# Altium PCB SRM_DOUBLE_V2_SIGNAL.PcbDoc (part 1 of 2)
Units mil, origin at the board's own origin, x right, y up, seen from the top; angles counter-clockwise.
Board outline 9351.05 x 5413.48 mil, 2 copper layers (Top Layer, Bottom Layer); 135 components, 145 nets, 510 pads, 115 vias.
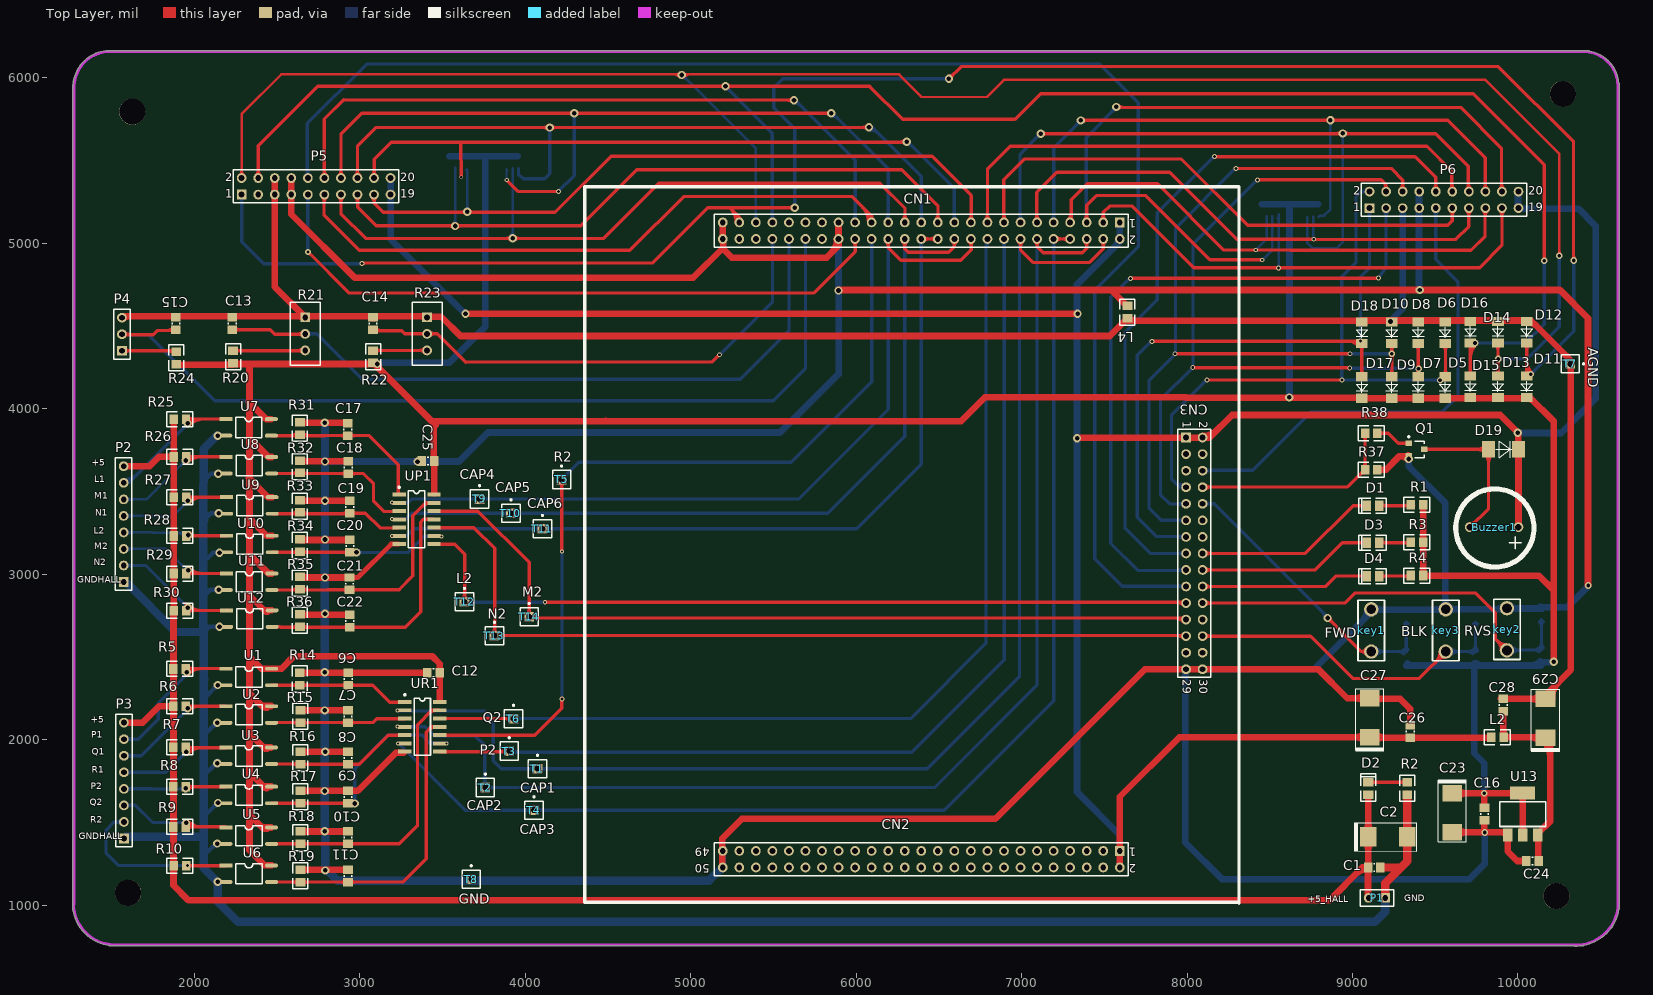
[diagram p0: Top Layer view]
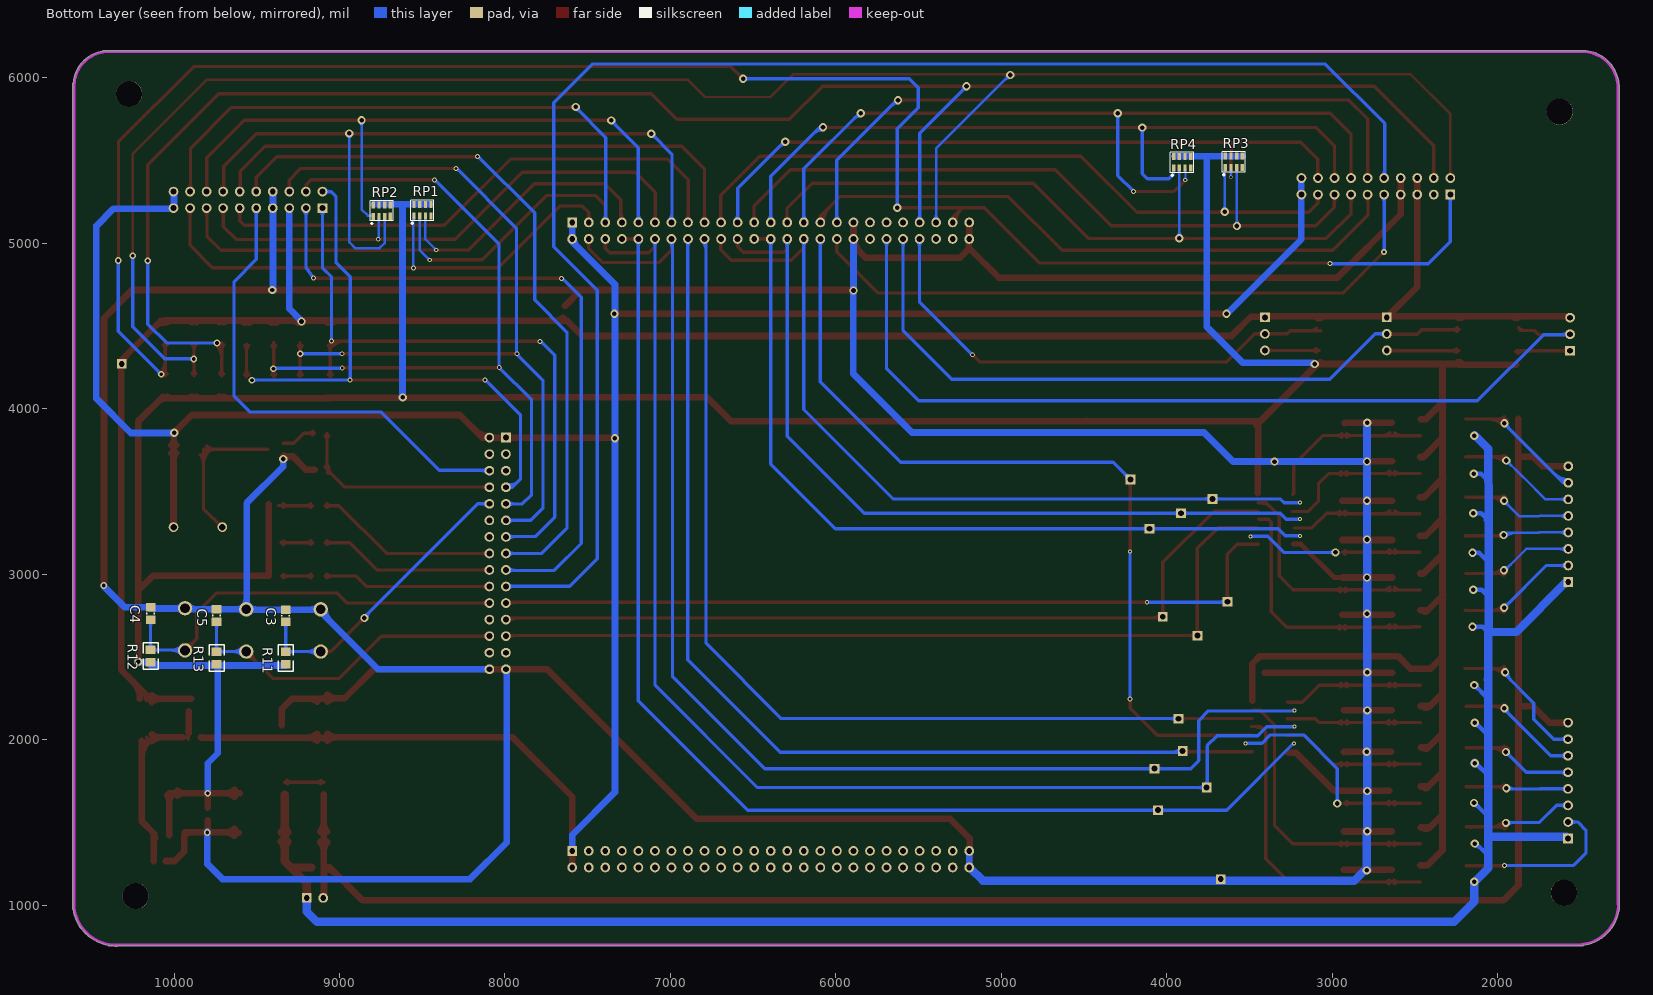
[diagram p1: Bottom Layer view, seen from below]

## Layer stack, top to bottom
Top Layer: signal copper 1.4
Dielectric: dielectric 12.6, FR-4, Dk 4.8
Bottom Layer: signal copper 1.4

## Board outline
1262.49,1006.88 ccw(c1519.77,1011.04) 1481.84,756.54 ccw(c1487,762) 1487,754.49 10339.9,754.49 ccw(c10345,760) 10344.9,752.49 ccw(c10348.5,1017.5) 10381.19,754.49 10393,754.49 ccw(c10393,762) 10398.85,757.29 ccw(c10348.5,1017.5) 10610.24,975.81 ccw(c10604,980) 10611.51,980 10611.51,984.8 ccw(c10348.5,1017.5) 10613.54,1016.64 ccw(c10606.02,1016.66) 10613.54,1016.66 ccw(c10606.02,1016.66) 10611.51,1021.79 10611.51,5964 ccw(c10604,5964) 10609.41,5969.22 ccw(c10394.7,5950.44) 10430.66,6162.95 ccw(c10425,6158) 10425,6165.52 10408.65,6165.52 ccw(c10394.7,5950.44) 10380.76,6165.52 1668,6165.52 ccw(c1668,6158) 1664.25,6164.52 1469,6164.52 ccw(c1469,6157) 1467.5,6164.36 ccw(c1466,6157) 1465.24,6164.48 ccw(c1487.78,5943.42) 1266.26,5960.85 ccw(c1272,5956) 1264.48,5956 1264.48,1012.1 ccw(c1270,1007)

## Design rules (kind name [scope] priority, off if disabled: settings)
Clearance [All] p1: gap=12
ComponentClearance [All] p1: gap=10 collisioncheckmode=3 verticalgap=10
HoleSize [All] p1: absolutevalues=TRUE maxlimit=1001 minlimit=1 maxpercent=80.000 minpercent=20.000
PolygonConnect [All] p1: connectstyle=Relief reliefconductorwidth=10 reliefentries=4 polygonreliefangle="90 Angle"
RoutingVias [All] p1: holewidth=28 width=50 viastyle="Through Hole" minholewidth=12 minwidth=22 maxholewidth=280 maxwidth=500
SolderMaskExpansion [All] p1: expansion=4
TestPointUsage [All] p1: valid=0 allowmultiple=FALSE
Testpoint [All] p1: side=15 testpointundercomponent=TRUE minsize=40 maxsize=100 preferedsize=60 minholesize=0 maxholesize=40 preferedholesize=32 testpointgrid=1 style=1023 order=0123456789
Width [All] p1: maxlimit=60 minlimit=10 preferedwidth=15
17 further rules are at their usual default settings.

## Components (designator, comment, footprint, x,y, rotation, side; value= is the part's Value field where it differs from the comment)
Buzzer1 "BUZZER" Buzzer 9863,3285 r180 top
C1 "104" C2012-0805 9131,1228 r180 top
C2 "10uF/25V" C_10UF/25V 9240,1414 r90 top
C3 "104" C2012-0805 9325,2749 r270 bottom
C4 "104" C2012-0805 10141,2762 r270 bottom
C5 "104" C2012-0805 9743,2750 r270 bottom
C6 "102" C2012-0805 2929,2367 r270 top
C7 "102" C2012-0805 2928,2141 r270 top
C8 "102" C2012-0805 2928,1889 r270 top
C9 "102" C2012-0805 2928,1654 r270 top
C10 "102" C2012-0805 2928,1408 r270 top
C11 "102" C2012-0805 2928,1177 r270 top
C12 "104" C2012-0805 3445,2405 r0 top
C13 "104" C2012-0805 2228,4516 r270 top
C14 "104" C2012-0805 3079,4515 r270 top
C15 "104" C2012-0805 1887,4516 r270 top
C16 "104" C2012-0805 9797,1551 r90 top
C17 "102" C2012-0805 2926,3876 r270 top
C18 "102" C2012-0805 2929,3646 r270 top
C19 "102" C2012-0805 2938,3407 r270 top
C20 "102" C2012-0805 2939,3170 r270 top
C21 "102" C2012-0805 2936,2943 r270 top
C22 "102" C2012-0805 2938,2717 r270 top
C23 "10uF/25V" C_10UF/25V 9604,1531 r0 top
C24 "104" C2012-0805 10088,1267 r0 top
C25 "104" C2012-0805 3411,3684 r0 top
C26 "104" C2012-0805 9349,2050 r270 top
C27 "10uF/25V" C_10UF/25V 9103,2160 r180 top
C28 "104" C2012-0805 9911,2209 r270 top
C29 "10uF/25V" C_10UF/25V 10165,2157 r180 top
CN1 "CN IO" HDR2X25 7593,5127 r180 top
CN2 "CN BUS" HDR2X25 7593,1328 r180 top
CN3 "CN IOE" HDR2X15 7994,3826 r270 top
D1 "FWD" LED-SMD 9123.26,3415 r0 top
D2 "" LED-SMD 9095,1707 r270 top
D3 "RVS" LED-SMD 9123.26,3191 r0 top
D4 "BLK" LED-SMD 9123.26,2989 r0 top
D5 "IN4148" IN4148 9560,4133 r270 top
D6 "IN4148" IN4148 9560,4464 r270 top
D7 "IN4148" IN4148 9397,4133 r270 top
D8 "IN4148" IN4148 9397,4464 r270 top
D9 "IN4148" IN4148 9237,4133 r270 top
D10 "IN4148" IN4148 9237,4464 r270 top
D11 "IN4148" IN4148 10053,4137 r270 top
D12 "IN4148" IN4148 10053,4468 r270 top
D13 "IN4148" IN4148 9879,4137 r270 top
D14 "IN4148" IN4148 9879,4468 r270 top
D15 "IN4148" IN4148 9712,4137 r270 top
D16 "IN4148" IN4148 9712,4468 r270 top
D17 "IN4148" IN4148 9056,4133 r270 top
D18 "IN4148" IN4148 9056,4464 r270 top
D19 "IN4007" DIODE4007 9903,3755 r0 top
key1 "FWD" KEY1 9113,2663 r270 top
key2 "RVS" KEY1 9933,2670 r270 top
key3 "BLK" KEY1 9563,2663 r270 top
L2 "10uH" R2012-0805 9876,2015 r0 top
L4 "10uH" R2012-0805 7639,4585 r90 top
P1 "Header 2" HDR1X2 9198,1044 r180 top
P2 "Header 8" HDR1X8 1572,2953 r90 top
P3 "Header 8" HDR1X8 1573,1403 r90 top
P4 "Header 3" HDR1X3 1561,4351 r90 top
P5 "Header 10X2" HDR2X10 2285,5295 r0 top
P6 "Header 10X2" HDR2X10 9103,5213 r0 top
Q1 "8050" NPN8050 9387,3755 r270 top
R1 "1K" R2012-0805 9389,3420 r0 top
R2 "1K" R2012-0805 9331,1706 r90 top
R3 "1K" R2012-0805 9389,3194 r0 top
R4 "1K" R2012-0805 9389,2992 r0 top
R5 "500R" R2012-0805 1910,2428 r0 top
R6 "500R" R2012-0805 1910,2202 r0 top
R7 "500R" R2012-0805 1910,1954 r0 top
R8 "500R" R2012-0805 1910,1716 r0 top
R9 "500R" R2012-0805 1910,1473 r0 top
R10 "500R" R2012-0805 1912,1238 r0 top
R11 "1K" R2012-0805 9324,2494 r270 bottom
R12 "1K" R2012-0805 10142,2506 r270 bottom
R13 "1K" R2012-0805 9743,2494 r270 bottom
R14 "10k" R2012-0805 2636,2367 r90 top
R15 "10k" R2012-0805 2640,2141 r90 top
R16 "10k" R2012-0805 2640,1890 r90 top
R17 "10k" R2012-0805 2640,1654 r90 top
R18 "10k" R2012-0805 2640,1408 r90 top
R19 "10k" R2012-0805 2640,1177 r90 top
R20 "100R" R2012-0805 2233,4314 r270 top
R21 "10K" Res3296 2669,4453 r270 top
R22 "100R" R2012-0805 3079,4315 r270 top
R23 "10K" Res3296 3406,4453 r270 top
R24 "100R" R2012-0805 1890,4308 r270 top
R25 "500R" R2012-0805 1911,3937 r0 top
R26 "500R" R2012-0805 1912,3709 r0 top
R27 "500R" R2012-0805 1912,3465 r0 top
R28 "500R" R2012-0805 1912,3232 r0 top
R29 "500R" R2012-0805 1912,3004 r0 top
R30 "500R" R2012-0805 1912,2780 r0 top
R31 "10k" R2012-0805 2637,3882 r90 top
R32 "10k" R2012-0805 2637,3650 r90 top
R33 "10k" R2012-0805 2637,3411 r90 top
R34 "10k" R2012-0805 2637,3174 r90 top
R35 "10k" R2012-0805 2637,2947 r90 top
R36 "10k" R2012-0805 2637,2721 r90 top
R37 "1K" R2012-0805 9113,3632 r0 top
R38 "1K" R2012-0805 9113,3853 r180 top
RP1 "4K7" Res_Pack4 8485,5200 r90 bottom
RP2 "4K7" Res_Pack4 8731,5198 r90 bottom
RP3 "4k7" Res_Pack4 3581,5493 r90 bottom
RP4 "4K7" Res_Pack4 3893,5490 r90 bottom
T1 "CAP1" PIN1 4073,1825 r0 top
T2 "CAP2" PIN1 3758,1711 r0 top
T3 "P2" PIN1 3903,1931 r0 top
T4 "CAP3" PIN1 4052,1574 r0 top
T5 "R2" PIN1 4219,3573 r0 top
T6 "Q2" PIN1 3928,2127 r0 top
T7 "AGND" PIN1 10316,4272 r270 top
T8 "GND" PIN1 3673,1157 r0 top
T9 "CAP4" PIN1 3723,3455 r0 top
T10 "CAP5" PIN1 3913,3369 r0 top
T11 "CAP6" PIN1 4103,3275 r0 top
T12 "L2" PIN1 3632,2834 r0 top
T13 "N2" PIN1 3813,2629 r0 top
T14 "M2" PIN1 4023,2743 r0 top
U1 "TLP181" TLP181 2190,2429 r0 top
U2 "TLP181" TLP181 2190,2202 r0 top
U3 "TLP181" TLP181 2190,1953 r0 top
U4 "TLP181" TLP181 2190,1716 r0 top
U5 "TLP181" TLP181 2190,1470 r0 top
U6 "TLP181" TLP181 2190,1240 r0 top
U7 "TLP181" TLP181 2189,3938 r0 top
U8 "TLP181" TLP181 2191,3709 r0 top
U9 "TLP181" TLP181 2194,3466 r0 top
U10 "TLP181" TLP181 2194,3233 r0 top
U11 "TLP181" TLP181 2192,3005 r0 top
U12 "TLP181" TLP181 2194,2782 r0 top
U13 "1117" 1117-3.3V 10024,1548 r0 top
UP1 "74HC14" 74HC14 3344,3336 r0 top
UR1 "74HC14" 74HC14 3379,2082 r0 top

## Footprints (in the part's own frame and the unit in brackets; to place one, negate y for a bottom-side part, rotate by r counter-clockwise, add the part's x,y. Pads: shape width x height; smd on the part's side, far side on the other; paste and mask are expansions set on the pad)
74HC14 [mm]
  rect 2.05x0.6 smd: 1(-2.724,3.704) 2(-2.724,2.434) 3(-2.724,1.164) 4(-2.724,-0.106) 5(-2.724,-1.376) 6(-2.724,-2.646) 7(-2.724,-3.916) 8(2.626,-3.916) 9(2.626,-2.646) 10(2.626,-1.376) 11(2.626,-0.106) 12(2.626,1.164) 13(2.626,2.434) 14(2.626,3.704)
  silkscreen extent -2.87,-4.48 1.2,4.95
1117-3.3V [mil]
  rect 59x79 smd: 1(-85.81,-124.94) 2(4.74,-124.94) 3(95.29,-124.94)
  rect 150x79 smd: 4(4.07,128.61)
  silkscreen extent -135,-73 145,77
Buzzer [mm] "直径12mm，脚距7.5mm"
  round 1.5 hole 1: 1(-3.556,0) 2(3.937,0)
  silkscreen extent -5.93,-5.87 6.06,6.13
C2012-0805 [mm]
  rect 1.3x1.5 smd: 1(-0.95,0) 2(0.95,0)
  silkscreen extent -0.1,-0.58 0.1,0.58
C_10UF/25V [mil] "3mm*10mm焊盘"
  rect 120x100 smd: 1(-1,145) 2(-1,-91)
  silkscreen extent -87,-148 84,227
DIODE4007 [mil] "间距5.08，宽2.54，贴片"
  rect 78.74x100 smd: 1(-81,0) 2(99,0)
  silkscreen extent -36,-50 60,50
HDR1X2 [mm] "Connector; Header; 2 Position"
  rect 1.5x1.5 hole 0.9: 1(0,0)
  round 1.5 hole 0.9: 2(2.54,0)
  silkscreen extent -1.27,-1.27 3.81,1.27
HDR1X3 [mm] "Connector; Header; 3 Position"
  rect 1.5x1.5 hole 0.9: 1(0,0)
  round 1.5 hole 0.9: 2(2.54,0) 3(5.08,0)
  silkscreen extent -1.27,-1.27 6.35,1.27
HDR1X8 [mm] "Connector; Header; 8 Position"
  rect 1.5x1.5 hole 0.9: 1(0,0)
  round 1.5 hole 0.9: 2(2.54,0) 3(5.08,0) 4(7.62,0) 5(10.16,0) 6(12.7,0) 7(15.24,0) 8(17.78,0)
  silkscreen extent -1.27,-1.27 19.05,1.27
HDR2X10 [mm] "Connector; Header; 10x2 Position"
  rect 1.5x1.5 hole 0.9: 1(0,0)
  round 1.5 hole 0.9: 2(0,2.54) 3(2.54,0) 4(2.54,2.54) 5(5.08,0) 6(5.08,2.54) 7(7.62,0) 8(7.62,2.54) 9(10.16,0) 10(10.16,2.54) 11(12.7,0) 12(12.7,2.54) 13(15.24,0) 14(15.24,2.54) 15(17.78,0) 16(17.78,2.54) 17(20.32,0) 18(20.32,2.54) 19(22.86,0) 20(22.86,2.54)
  silkscreen extent -1.27,-1.27 24.13,3.81
HDR2X15 [mm] "Connector; Header; 15x2 Position"
  rect 1.5x1.5 hole 0.9: 1(0,0)
  round 1.5 hole 0.9: 2(0,2.54) 3(2.54,0) 4(2.54,2.54) 5(5.08,0) 6(5.08,2.54) 7(7.62,0) 8(7.62,2.54) 9(10.16,0) 10(10.16,2.54) 11(12.7,0) 12(12.7,2.54) 13(15.24,0) 14(15.24,2.54) 15(17.78,0) 16(17.78,2.54) 17(20.32,0) 18(20.32,2.54) 19(22.86,0) 20(22.86,2.54) 21(25.4,0) 22(25.4,2.54) 23(27.94,0) 24(27.94,2.54) 25(30.48,0) 26(30.48,2.54) 27(33.02,0) 28(33.02,2.54) 29(35.56,0) 30(35.56,2.54)
  silkscreen extent -1.27,-1.27 36.83,3.81
HDR2X25 [mm] "Connector; Header; 25x2 Position"
  rect 1.5x1.5 hole 0.9: 1(0,0)
  round 1.5 hole 0.9: 2(0,2.54) 3(2.54,0) 4(2.54,2.54) 5(5.08,0) 6(5.08,2.54) 7(7.62,0) 8(7.62,2.54) 9(10.16,0) 10(10.16,2.54) 11(12.7,0) 12(12.7,2.54) 13(15.24,0) 14(15.24,2.54) 15(17.78,0) 16(17.78,2.54) 17(20.32,0) 18(20.32,2.54) 19(22.86,0) 20(22.86,2.54) 21(25.4,0) 22(25.4,2.54) 23(27.94,0) 24(27.94,2.54) 25(30.48,0) 26(30.48,2.54) 27(33.02,0) 28(33.02,2.54) 29(35.56,0) 30(35.56,2.54) 31(38.1,0) 32(38.1,2.54) 33(40.64,0) 34(40.64,2.54) 35(43.18,0) 36(43.18,2.54) 37(45.72,0) 38(45.72,2.54) 39(48.26,0) 40(48.26,2.54) 41(50.8,0) 42(50.8,2.54) 43(53.34,0) 44(53.34,2.54) 45(55.88,0) 46(55.88,2.54) 47(58.42,0) 48(58.42,2.54) 49(60.96,0) 50(60.96,2.54)
  silkscreen extent -1.27,-1.27 62.23,3.81
IN4148 [mm] "贴片"
  rect 1.4x1.8 smd: 1(-1.549,0) 2(1.753,0)
  silkscreen extent -0.76,-0.89 0.89,0.89
KEY1 [mm] "3.5mm*6mm，两个引脚"
  round 2.2 hole 1.5: 1(-3.175,0) 3(3.302,0)
  silkscreen extent -4.57,-2.03 4.7,2.03
LED-SMD [mm] "贴片LED，0805"
  rect 1.3x1.6 smd: 1(0.975,0) 2(-0.925,0)
  silkscreen extent -2.21,-1.15 2.03,1.15
NPN8050 [mm] "SOT23"
  rect 0.85x1 smd: 1(-0.95,-1.2) 2(0.95,-1.2) 3(0,1.2)
  silkscreen extent -2.05,-1.32 1.28,1.2
PIN1 [mm] "Connector; Plug"
  rect 1.5x1.5 hole 0.9: 1(0,0)
  silkscreen extent -1.4,-1.4 1.4,2.17
R2012-0805 [mm]
  rect 1.3x1.5 smd: 1(-0.95,0) 2(0.95,0)
  silkscreen extent -2,-1.15 2,1.15
Res3296 [mm]
  rect 1.5x1.5 hole 0.9: 1(-2.54,0)
  round 1.5 hole 0.9: 2(0,0) 3(2.54,0)
  silkscreen extent -4.83,-2.29 4.83,2.29
Res_Pack4 [mm] "四排阻"
  rect 1.1x0.5 smd: 1(-0.889,1.634) 2(-0.889,0.771) 3(-0.889,-0.118) 4(-0.864,-0.982) 5(0.889,-0.982) 6(0.889,-0.118) 7(0.889,0.771) 8(0.889,1.634)
  silkscreen extent -1.98,-1.42 1.55,2.13
TLP181 [mm]
  rect 2x0.6 smd: 1(0,0)
  oval 2x0.6 smd: 3(0,-2.54) 4(7,-2.54) 6(7,0)
  silkscreen extent 1.52,-2.84 5.54,0.28

## Part data
Buzzer1: "蜂鸣器"
C1 C3 C4 C5 C6 C7 C8 C9 C10 C11 C12 C13 C14 C15 C16 C17 C18 C19 C20 C21 C22 C24 C25 C26 C28: library part Cap, "普通电容"
C2 C23 C27 C29: library part "Cap tan", "钽电解"
CN1 CN2: library part "Header 25X2", "Header, 25-Pin, Dual row"
CN3: library part "Header 15X2", "Header, 15-Pin, Dual row"
D1 D2 D3 D4: library part LED
D5 D6 D7 D8 D9 D10 D11 D12 D13 D14 D15 D16 D17 D18: library part "Diode IN4148", "开关二极管"
D19: library part "Diode IN4007", "普通整流二极管"
key1 key2 key3: library part KEY, "按键"
L2 L4: library part Inductor
P1: "Header, 2-Pin"
P2 P3: "Header, 8-Pin"
P4: "Header, 3-Pin"
P5 P6: "Header, 10-Pin, Dual row"
Q1: library part NPN8050
R1 R2 R3 R4 R5 R6 R7 R8 R9 R10 R11 R12 R13 R14 R15 R16 R17 R18 R19 R20 R22 R24 R25 R26 R27 R28 R29 R30 R31 R32 R33 R34 R35 R36 R37 R38: library part Res
R21 R23: library part Res3296, "微调电位器"
T1 T2 T3 T4 T5 T6 T7 T8 T9 T10 T11 T12 T13 T14: library part TP, "测试脚"
UP1 UR1: "六路，施密特触发反相器"

## Free pads (board coordinates)
  round 157.48 hole 157.48: 0(1624,5796) 1(1599,1075) 2(10232,1055) 3(10271,5904)

## Via types
v1: diameter 50, hole 28, Top Layer to Bottom Layer, 67 vias
v2: diameter 30, hole 18, Top Layer to Bottom Layer, 19 vias
v3: diameter 40, hole 22, Top Layer to Bottom Layer, 12 vias
v4: diameter 24, hole 12, Top Layer to Bottom Layer, 9 vias
v5: diameter 26, hole 14, Top Layer to Bottom Layer, 5 vias
v6: diameter 50, hole 26, Top Layer to Bottom Layer, 1 vias
v7: diameter 35, hole 18, Top Layer to Bottom Layer, 1 vias
v8: diameter 22, hole 14, Top Layer to Bottom Layer, 1 vias

## Nets (pads, with @x,y where several pads share a name; then routed paths per layer and width w, separated by ;. In a path a pad name is that pad's centre, name@x,y a point inside that pad or via, vN(x,y) a via of type N, cw(c..) or ccw(c..) an arc to the next point about the centre after c; other vN are vias at no path point)
3.3_OPT: C12.2 C16.2 C23.1 C25.2 D5.2 D7.2 D9.2 D11.2 D13.2 D15.2 D17.2 R1.2 R3.2 R4.2 R11.2 R12.2 R13.2 R20.2 R22.2 R24.2 RP1.5 RP1.6 RP1.7 RP1.8 RP2.5 RP2.6 RP2.7 RP2.8 RP3.5 RP3.6 RP3.7 RP3.8 RP4.5 RP4.6 RP4.7 RP4.8 U1.6 U2.6 U3.6 U4.6 U5.6 U6.6 U7.6 U8.6 U9.6 U10.6 U11.6 U12.6 U13.2 U13.4 UP1.14 UR1.14 | length 25123.9
  Top Layer w40: R24.2@1888,4267 R20.2@2234,4267 ; 2192.39,4267 ccw(c2192.39,4313.27) R20.2@2225.11,4280.55 ; R20.2@2235,4271 R22.2@3083,4271 ; R20.2@2240.89,4280.55 ccw(c2263.95,4303.61) 2263.95,4271 ; 2327,3584 2445,3466 U9.6@2469.59,3466 ; 2328,2876 2422,2782 U12.6@2466,2782 ; 2329,3340 2437,3232 2468.59,3232 U10.6@2469.59,3233 ; 2329,4042 2433,3938 U7.6@2464.59,3938 ; 2330,3123 2448,3005 U11.6@2467.59,3005 ; 2331,1804 2418,1717 U4.6@2464,1717 ; 2331,3826 2448,3709 U8.6@2466.59,3709 ; 2331.5,2280.5 2408,2204 U2.6@2464,2204 ; 2332,2039 2417,1954 ; 2332,4269 2332,1332 2424,1240 U6.6@2465.59,1240 ; 2332.5,1546.5 2411,1468 ; 2334,2499 2404,2429 2526,2429 2602,2505 3436,2505 3482,2459 C12.2@3482,2407 ; 2402.45,1476.55 ccw(c2438.03,1512.13) U5.6@2438.03,1461.81 ; 2404.16,2207.84 ccw(c2438.03,2241.72) U2.6@2438.03,2193.81 ; 2411,1469 U5.6@2464,1469 ; 2417.82,1953.18 ccw(c2438.03,1973.4) U3.6@2438.03,1944.81 ; 2419,1953 U3.6@2462,1953 ; 2419.52,1715.48 ccw(c2438.03,1733.99) U4.6@2438.03,1707.81 ; 2421.82,2782.18 ccw(c2442.03,2802.4) U12.6@2442.03,2773.81 ; 3045.64,4271 ccw(c3045.64,4307.02) R22.2@3071.11,4281.55 ; R22.2@3090,4268 3456.5,3901.5 ; v1@3110,4271 ccw(c3165.53,4271) 3126.26,4231.74 ; 3434,3925 4483.71,3925 4485.71,3927 4487.71,3925 6633.13,3925 6778.13,4070 7995.84,4070 7996,4066 D17.2@9076,4066 ; C25.2@3447,3680 3447,3922 ; UP1.14@3448.4,3489 C25.2@3448.4,3684 ; UR1.14@3482.4,2235 3482.4,2367 C12.2@3483,2403 ; D17.2@9056,4064 D11.2@10041,4064 ; R4.2@9426.4,2992 10126,2992 10217,2901 ; R4.2@9427,2994 R1.2@9427,3423 ; D5.2@9561,4063 D5.2@9562,4062 ; C23.1@9603,1676 U13.4@10029,1676 ; C23.1@9634.21,1654.79 cw(c9685.43,1603.57) 9685.43,1676 cw(c9685.43,1748.43) C23.1@9634.21,1697.21 ; 9676.22,4064 ccw(c9676.22,4095.91) D15.2@9698.78,4073.35 ; D15.2@9725.22,4073.35 ccw(c9747.78,4095.91) 9747.78,4064 ; C16.2@9797,1588.4 v3@9797,1676 ; 9843.22,4064 ccw(c9843.22,4095.91) D13.2@9865.78,4073.35 ; D13.2@9892.22,4073.35 ccw(c9914.78,4095.91) 9914.78,4064 ; 9944.02,1676 ccw(c9944.02,1725.15) U13.4@9978.78,1690.4 ; 9946.96,1676 cw(c9946.96,1631) U13.4@9978.78,1662.82 ; U13.4@10014.28,1662.82 cw(c9979.37,1627.91) 10028.74,1627.91 ; 10017.22,4064 ccw(c10017.22,4095.91) D11.2@10039.78,4073.35 ; U13.4@10028.07,1676.61 10028.74,1675.94 U13.2@10028.74,1423.06 ; 10028.74,1631.15 cw(c10073.52,1631.15) U13.4@10041.86,1662.82 ; D11.2@10051,4067 D11.2@10053.02,4067.04 ; D11.2@10060.87,4060.44 cw(c10060.87,4012.92) 10094.48,4046.52 ; D11.2@10068.5,4072.5 10217,3924 v1@10217,2471
  Bottom Layer w40: v1@3108.54,4267.46 cw(c3133.97,4242.03) 3133.97,4278 ; v1@3111,4278 3538,4278 3758,4498 3758,5523 ; RP3.5@3539,5527 RP4.8@3952,5527 ; RP1.5@8452,5236 RP2.8@8792,5236 ; v1@8619,4066 8619,5234 ; R11.2@9324,2448.6 R12.2@10139,2448.6 ; R11.2@9331.89,2460.55 ccw(c9360.75,2489.41) 9360.75,2448.6 ; 9706.25,2448.6 ccw(c9706.25,2489.41) R13.2@9735.11,2460.55 ; R13.2@9743,2456.6 9736,2449.6 9736,1918 9796,1858 v3(9796,1677) ; R13.2@9750.89,2460.55 ccw(c9779.75,2489.41) 9779.75,2448.6 ; 10076.28,2448.6 ccw(c10076.28,2530.38) R12.2@10134.11,2472.55 ; R12.2@10141,2467.6 R12.2@10142,2468.6 ; R12.2@10143,2468 10180,2468.6 10214.6,2468.6 v1@10216,2470
  other v1: 10216,2471 8617,4069 3105,4271
+5V: Buzzer1.1 C26.2 C27.1 CN1.1 CN1.2 CN2.1 CN2.2 CN3.1 CN3.2 D19.2 L2.1 P5.19 P5.20 P6.19 P6.20 | length 17803
  Top Layer w10: D19.2@9986.09,3800.12 ccw(c9967.91,3822.92) 9997,3825
  Top Layer w40: v1(3638,4575) v1(7338,4575) ; v1@7332,3826 8136,3826 8273,3963 9893,3963 10002,3854 D19.2@10002,3756 ; CN2.2@7593,1228 7593,1655 7953,2015 9036,2015 ; CN3.2@8094,3835.53 ccw(c8094,3959.93) 8181.96,3871.96 ; C27.1@9069.52,1997.67 ccw(c9036,1973.94) 9036,2015 ; C27.1@9069.52,2032.33 cw(c9036,2056.06) 9036,2015 ; C27.1@9072.79,1993.79 ccw(c9021.57,1942.57) 9021.57,2015 ccw(c9021.57,2087.43) C27.1@9072.79,2036.21 ; C27.1@9094,2009 9036,2015 ; C27.1@9106,2012.6 9836.2,2012.6 L2.1@9838.6,2015 ; C27.1@9135.21,1993.79 cw(c9180.63,1948.37) 9180.63,2012.6 ; C27.1@9135.21,2036.21 ccw(c9192.23,2093.23) 9192.23,2012.6 ; D19.2@9988.3,3730.67 cw(c9952.82,3695.19) 10003,3695.19 ; D19.2@9988.3,3779.33 ccw(c9955.24,3812.39) 10002,3812.39 ccw(c10048.76,3812.39) D19.2@10015.7,3779.33 ; D19.2@10002,3755 10003,3754 Buzzer1.1@10003,3287 ; 10003,3700.02 cw(c10046.35,3700.02) D19.2@10015.7,3730.67
  Bottom Layer w40: P5.20@3184,5399 3186,5397 3186,5024 3635,4575 v1(3638,4575) ; 7565.42,4983.42 ccw(c7521.84,5027) CN1.2@7583.47,5027 ; CN2.1@7592,1324 7592,1425 7334,1683 7334,4752 CN1.2@7600,5018 ; CN1.2@7593,5019 CN1.1@7593,5134 ; v1@10000,3854 10261,3854 10469,4062 10469,5106 10365,5210 P6.19@10003,5210 ; P6.19@10000,5215 P6.20@10000,5315 ; 10000,5243.24 ccw(c10033.24,5243.24) 10009.74,5219.74 ccw(c10033.24,5243.24) 10033.24,5210 ; 10000,5282.76 cw(c10033.24,5282.76) P6.20@10009.74,5306.26
  other v1: 7335,3823 9998,3855
+5V_HALL: C1.2 C2.1 D2.1 P1.2 P2.8 P3.8 R5.1 R6.1 R7.1 R8.1 R9.1 R10.1 R25.1 R26.1 R27.1 R28.1 R29.1 R30.1 | length 11862.3
  Top Layer w40: P2.8@1572,3653 1728,3653 1785,3710 R26.1@1874.6,3710 ; P3.8@1573,2103 1687,2103 1786,2202 1839,2202 1872.48,2203.99 R6.1@1872.6,2204 ; R10.1@1872.6,1236 1872.6,1470 1873,1470.4 1873,1953.6 R7.1@1872.6,1954 R5.1@1872.6,2427 ; R10.1@1873,1243 1873,1120 1964,1029 8860,1029 9059,1228 ; R5.1@1873,2424 1872.96,2428 1872.6,2466 1872.6,2778 R30.1@1874.6,2780 R25.1@1874.6,3939 ; 9018.27,1187.27 cw(c9093.6,1111.94) C1.2@9093.6,1218.47 ; 9041.7,1210.7 cw(c9076.54,1175.87) C1.2@9091.86,1222.69 ; 9060,1228 9093.49,1229.91 C1.2@9095,1230 ; C2.1@9073.79,1381.79 cw(c9022.57,1330.57) 9095,1330.57 cw(c9167.43,1330.57) C2.1@9116.21,1381.79 ; C2.1@9073.79,1444.21 ccw(c9022.57,1495.43) 9095,1495.43 ccw(c9167.43,1495.43) C2.1@9116.21,1444.21 ; 9093.6,1077.63 ccw(c9131.63,1077.63) P1.2@9104.74,1050.74 ; C2.1@9095,1413 C2.1@9095.6,1412.4 ; D2.1@9095,1670 C1.2@9095,1230 ; P1.2@9098,1044 9093.6,1048.4 9093.6,1190 9094.93,1227.95 C1.2@9095,1230
/C1TRIP: CN1.4 CN1.14 T1.1 UR1.2 | length 7999.9
  Top Layer w20: CN1.14@6979.19,5013.19 cw(c6945.86,4979.86) 6993,4979.86 cw(c7040.14,4979.86) CN1.14@7006.81,5013.19 ; CN1.14@6993,5027 6993,4960 7068,4885 7410,4885 7494,4969 7494,5026 CN1.4@7493,5027 ; CN1.4@7479.19,5013.19 cw(c7443.44,4977.44) 7494,4977.44 ; 7494,4982.27 cw(c7537.73,4982.27) CN1.4@7506.81,5013.19
  Bottom Layer w20: v4@3228,2174 3748,2174 3806,2116 3806,1874 3855,1825 T1.1@4076,1825 ; v4@3229,2177 v4@3231,2175 ; v4@3229.73,2179.1 ccw(c3242.04,2191.4) 3242.04,2174 ; T1.1@4059.19,1811.19 ccw(c4025.86,1777.86) 4025.86,1825 ccw(c4025.86,1872.14) T1.1@4059.19,1838.81 ; T1.1@4072,1824 6428,1824 6987,2383 6987,5022 CN1.14@6988,5022 ; T1.1@4086.81,1811.19 cw(c4117.73,1780.27) 4117.73,1824 ; T1.1@4086.81,1838.81 ccw(c4122.56,1874.56) 4122.56,1824 ; CN1.14@6979.19,5013.19 cw(c6960.34,4994.34) 6987,4994.34 ; 6987,4965.37 cw(c7054.63,4965.37) CN1.14@7006.81,5013.19
  other v4: 3228.32,2177.68
/C2TRIP: CN1.16 T3.1 UR1.8 | length 6403.4
  Top Layer w20: UR1.8@3482.39,1927.83 3887.83,1927.83 3888,1928 T3.1@3899,1928 ; 3848.2,1927.83 ccw(c3848.2,1985.8) T3.1@3889.19,1944.81 ; 3863.52,1927.83 cw(c3863.52,1891.52) T3.1@3889.19,1917.19
  Bottom Layer w20: T3.1@3905,1925 6336,1925 6894,2483 6894,5026 CN1.16@6893,5027 ; T3.1@3916.81,1917.19 cw(c3935.66,1898.34) 3935.66,1925 ; T3.1@3916.81,1944.81 ccw(c3964.63,1992.63) 3964.63,1925 ; CN1.16@6879.19,5013.19 cw(c6843.44,4977.44) 6894,4977.44 ; 6894,4982.27 cw(c6937.73,4982.27) CN1.16@6906.81,5013.19
/C3TRIP: CN1.18 T6.1 UR1.12 | length 6160.3
  Top Layer w20: UR1.12@3482.39,2127.83 3927.17,2127.83 T6.1@3928,2127 ; 3878.86,2127.83 cw(c3878.86,2077.86) T6.1@3914.19,2113.19 ; 3882.85,2127.83 ccw(c3882.85,2172.15) T6.1@3914.19,2140.81
  Bottom Layer w20: T6.1@3927.17,2127.83 6328.83,2127.83 6784,2583 6784,5024 6793,5033 CN1.18@6793,5027 ; T6.1@3941.81,2113.19 cw(c3977.14,2077.86) 3977.14,2127.83 ; T6.1@3941.81,2140.81 ccw(c3973.15,2172.15) 3973.15,2127.83 ; 6784,4958.13 cw(c6861.87,4958.13) CN1.18@6806.81,5013.19
/C4TRIP: CN1.20 CN1.30 T9.1 UP1.2 | length 5314.3
  Top Layer w20: CN1.30@6179.19,5013.19 cw(c6145.86,4979.86) 6193,4979.86 cw(c6240.14,4979.86) CN1.30@6206.81,5013.19 ; CN1.30@6193,5027 6193,4975 6270,4898 6632,4898 6695,4961 6695,5025 CN1.20@6693,5027 ; CN1.20@6679.19,5013.19 cw(c6641.03,4975.03) 6695,4975.03 ; 6695,4984.68 cw(c6735.32,4984.68) CN1.20@6706.81,5013.19
  Bottom Layer w20: v4@3192,3433 3290,3433 3312,3455 5652,3455 6193,3996 CN1.30@6193,5027 ; T9.1@3709.19,3441.19 ccw(c3675.86,3407.86) 3675.86,3455 ccw(c3675.86,3502.14) T9.1@3709.19,3468.81 ; T9.1@3736.81,3441.19 cw(c3770.14,3407.86) 3770.14,3455 cw(c3770.14,3502.14) T9.1@3736.81,3468.81 ; CN1.30@6179.19,5013.19 cw(c6145.86,4979.86) 6193,4979.86 cw(c6240.14,4979.86) CN1.30@6206.81,5013.19
  other v4: 3194,3433
/C5TRIP: CN1.32 T5.1 UR1.10 | length 5406.1
  Top Layer w20: UR1.10@3482.39,2027.83 4056.83,2027.83 4219,2190 v2@4219,2250 ; T5.1@4205.19,3559.19 cw(c4169.44,3523.44) 4220,3523.44 ; 4219,2227.69 cw(c4241.31,2227.69) v2@4225.54,2243.46 ; v4(4220,3139) T5.1@4220,3571 ; 4220,3528.27 cw(c4263.73,3528.27) T5.1@4232.81,3559.19
  Bottom Layer w20: T5.1@4219,3573 4324,3678 5607,3678 6093,4164 CN1.32@6093,5027 CN1.32@6095,5025 ; T5.1@4219,3592.53 ccw(c4219,3639.67) 4252.34,3606.34 ccw(c4285.67,3573) T5.1@4238.53,3573 ; v2@4221,2250 v4@4221,3136 ; CN1.32@6079.19,5013.19 cw(c6045.86,4979.86) 6093,4979.86 cw(c6140.14,4979.86) CN1.32@6106.81,5013.19
  other v2: 4222,2247
/C6TRIP: CN1.34 P5.9 | length 4131.1
  Top Layer w20: v7@2686,4940.5 cw(c2686,4922.39) 2698.8,4935.2 cw(c2711.61,4948) v7@2693.5,4948 ; v7(2686,4948) 2934,4700 5742,4700 5993,4951 CN1.34@5993,5027 ; CN1.34@5979.19,5013.19 cw(c5945.86,4979.86) 5993,4979.86 cw(c6040.14,4979.86) CN1.34@6006.81,5013.19
  Bottom Layer w20: P5.9@2671.19,5281.19 cw(c2637.86,5247.86) 2685,5247.86 cw(c2732.14,5247.86) P5.9@2698.81,5281.19 ; v7@2685,4946 P5.9@2685,5294 ; 2685,4968.52 ccw(c2706.52,4968.52) v7@2691.3,4953.3
/CS0_1: CN2.39
/CS2: CN2.40
/CS6_7: CN2.41
/FAULT: CN3.17 P6.3 | length 4259.9
  Top Layer w20: v2@7660,4790 v2(9157,4790)
  Bottom Layer w20: 7642.64,4777.64 cw(c7658,4762.27) v2@7658,4784 ; v2@7650,4785 7539,4674 7539,3186 7702,3023 CN3.17@7995,3023 ; 7939.61,3023 ccw(c7939.61,3080.39) CN3.17@7980.19,3039.81 ; 7954.1,3023 cw(c7954.1,2986.1) CN3.17@7980.19,3012.19 ; v2(9157,4790) 9202,4854 P6.3@9202,5205 ; P6.3@9189.19,5199.19 cw(c9158.27,5168.27) 9202,5168.27 ; 9202,5163.44 cw(c9252.56,5163.44) P6.3@9216.81,5199.19
  other v2: 7658,4789
/RD: CN2.37
/WR: CN2.38
A0: CN2.19
A1: CN2.20
A2: CN2.21
A3: CN2.22
A4: CN2.23
A5: CN2.24
A6: CN2.25
A7: CN2.26
A8: CN2.27
A9: CN2.28
A10: CN2.29
A11: CN2.30
A12: CN2.31
A13: CN2.32
A14: CN2.33
A15: CN2.34
A16: CN2.35
A17: CN2.36
A18: CN2.42
A+5V: C24.2 C28.2 C29.1 L2.2 U13.3 | length 1457.4
  Top Layer w20: C28.2@9911,2171.6 C28.2@9912,2170.6 ; L2.2@9913,2013 L2.2@9913.02,2014.6 ; L2.2@9913.08,2014.6 9913.41,2014.6 9947,2015 ; L2.2@9913.19,2000.98 L2.2@9913.07,2014.6 ; L2.2@9913.4,2015 L2.2@9913,2014.6 ; 9913.4,2053 L2.2@9913.05,2017.74 ; U13.3@10119.29,1423.06 U13.3@10122,1420.36 ; C29.1@10165,2016 C29.1@10165.06,2011.98 ; L2.2@9913.02,2014.6 L2.2@9913.07,2014.6 ; L2.2@9913.02,2014.61 9913.02,2015 L2.2@9913.05,2017.74 ; L2.2@9913.07,2014.6 9913.07,2014.67 9913.07,2015 L2.2@9913.05,2017.74
  Top Layer w40: L2.2@9912,2039 C28.2@9912,2170.6 ; 9912,2054.4 9913.4,2053 ; 9947,2015 10105.6,2015 ; 10076.33,2015 cw(c10076.33,1932.33) C29.1@10134.79,1990.79 ; 10090.82,2015 ccw(c10090.82,2077.18) C29.1@10134.79,2033.21 ; U13.3@10112.57,1406.35 cw(c10089.82,1383.59) U13.3@10122,1383.59 ; U13.3@10119.29,1423.06 10119.29,1431.29 10196,1508 C29.1@10196,1994 ; C24.2@10122,1267 U13.3@10122,1420.36 ; C29.1@10128.5,2000 ccw(c10105.6,1990.01) 10105.6,2015 ; C29.1@10131.02,2028.62 cw(c10105.6,2045.54) 10105.6,2015 ; C29.1@10154.79,1990.79 cw(c10055.29,1891.29) 10196,1891.29
A_GND: 
ABSVAL: CN3.13 D17.1 D18.2 P6.1 | length 4179.5
  Top Layer w20: v2@7787,4409 9044,4409 D18.2@9056,4397 ; 8971.94,4409 cw(c8971.94,4318.81) D18.2@9035.71,4382.58 ; 9020.22,4409 cw(c9020.22,4367.09) D18.2@9049.85,4396.73 ; D17.1@9043.58,4206.42 ccw(c9013.61,4236.39) 9056,4236.39 ccw(c9098.39,4236.39) D17.1@9068.42,4206.42 ; D18.2@9043.58,4382.58 cw(c9013.61,4352.61) 9056,4352.61 cw(c9098.39,4352.61) D18.2@9068.42,4382.58 ; D18.2@9044.46,4405.46 cw(c9016.62,4377.62) D18.2@9056,4377.62 ; D17.1@9056,4194 D18.2@9056,4395
  Bottom Layer w20: 7771.64,4396.64 cw(c7787,4381.27) v2@7787,4403 ; v2@7784,4409 7699,4324 7699,3346 7817,3228 CN3.13@7993,3228 ; 7942.03,3228 cw(c7942.03,3174.03) CN3.13@7980.19,3212.19 ; 7951.68,3228 ccw(c7951.68,3268.32) CN3.13@7980.19,3239.81 ; v2(9048,4409) 9048,4797 9102,4851 P6.1@9102,5217 ; P6.1@9089.19,5199.19 cw(c9058.27,5168.27) 9102,5168.27 ; 9102,5163.44 cw(c9152.56,5163.44) P6.1@9116.81,5199.19
  other v2: 7787,4408
ADCA0: CN1.37
ADCA1: CN1.39
ADCA2: CN1.41
ADCA3: CN1.43 D15.1 D16.2 P5.4 | length 11730.3
  Top Layer w20: P5.4@2371.19,5408.81 ccw(c2337.86,5442.14) 2385,5442.14 ccw(c2432.14,5442.14) P5.4@2398.81,5408.81 ; P5.4@2385,5398 2385,5590 2745,5950 6081,5950 ; v1@5199.39,5939.39 ccw(c5173.79,5913.79) 5173.79,5950 ccw(c5173.79,5986.21) v1@5199.39,5960.61 ; v1@5220.61,5939.39 cw(c5246.21,5913.79) 5246.21,5950 cw(c5246.21,5986.21) v1@5220.61,5960.61 ; 6083,5947 6280,5750 6960,5750 7114,5904 9729,5904 10159,5474 v3@10159,4891 ; D15.1@9699.58,4210.42 ccw(c9669.61,4240.39) 9712,4240.39 ccw(c9754.39,4240.39) D15.1@9724.42,4210.42 ; D16.2@9699.58,4386.58 cw(c9669.61,4356.61) 9712,4356.61 cw(c9754.39,4356.61) D16.2@9724.42,4386.58 ; D15.1@9712,4198 D16.2@9712,4401 ; 9712,4306.26 cw(c9831.74,4306.26) D16.2@9747.07,4390.93 ; 9712,4354.54 cw(c9783.46,4354.54) D16.2@9732.93,4405.07 ; v3@10151.93,4903.07 ccw(c10134.86,4920.14) 10159,4920.14 ccw(c10183.14,4920.14) v3@10166.07,4903.07
  Bottom Layer w20: v1@5207.5,5950.5 5493,5665 CN1.43@5493,5127 ; v1@5210,5935 cw(c5210,5903.62) 5232.19,5925.81 ; v1@5225,5950 ccw(c5266.04,5950) 5237.02,5920.98 ; CN1.43@5479.19,5140.81 ccw(c5445.86,5174.14) 5493,5174.14 ccw(c5540.14,5174.14) CN1.43@5506.81,5140.81 ; v3(9740,4398) 10045,4399 10158,4512 10158,4893 v3@10161,4896 ; v3@9747.05,4405.09 ccw(c9764.06,4422.22) 9764.14,4398.08 ccw(c9764.22,4373.94) v3@9747.09,4390.95 ; v3@10151.93,4888.93 cw(c10137.27,4874.27) 10158,4874.27 ; 10158,4869.44 cw(c10185.56,4869.44) v3@10166.07,4888.93
  other v1: 5210,5950
  other v3: 10159,4896
ADCA4: CN1.45 D13.1 D14.2 P5.2 | length 12199.6
  Top Layer w15: P5.2@2269.42,5410.58 ccw(c2231.82,5448.18) 2285,5448.18 ccw(c2338.18,5448.18) P5.2@2300.58,5410.58 ; P5.2@2285,5398 2285,5783 2524,6022 6259,6022 6260,6021 ; 4893.09,6022 cw(c4893.09,5966.09) v1@4932.63,6005.63 ; 4912.41,6022 ccw(c4912.41,6050.59) v1@4932.63,6030.37 ; v1@4957.37,6005.63 cw(c4996.91,5966.09) 4996.91,6022 ; v1@4957.37,6030.37 ccw(c4977.59,6050.59) 4977.59,6022 ; 6259.5,6020.5 6395,5885 6790,5885 6893,5988 9803,5988 10250,5541 v3@10250,4919 ; v3@10241.16,4933.84 ccw(c10219.82,4955.18) 10250,4955.18 ccw(c10280.18,4955.18) v3@10258.84,4933.84
  Top Layer w20: D13.1@9866.58,4210.42 ccw(c9836.61,4240.39) 9879,4240.39 ccw(c9921.39,4240.39) D13.1@9891.42,4210.42 ; D14.2@9866.58,4386.58 cw(c9836.61,4356.61) 9879,4356.61 cw(c9921.39,4356.61) D14.2@9891.42,4386.58 ; v3@9872.93,4293.93 cw(c9858.27,4279.27) 9879,4279.27 ; v3@9872.93,4308.07 ccw(c9858.27,4322.73) 9879,4322.73 ; D13.1@9879,4198 D14.2@9879,4399 ; 9879,4274.44 cw(c9906.56,4274.44) v3@9887.07,4293.93 ; 9879,4327.56 ccw(c9906.56,4327.56) v3@9887.07,4308.07
  Bottom Layer w15: v1@4944,6023 5393,5574 CN1.45@5393,5129 ; v1@4945,6000.5 cw(c4945,5948.59) 4981.7,5985.3 ; v1@4962.5,6018 ccw(c4995.09,6018) 4972.05,5994.95 ; CN1.45@5377.42,5142.58 ccw(c5339.82,5180.18) 5393,5180.18 ccw(c5446.18,5180.18) CN1.45@5408.58,5142.58
  Bottom Layer w20: v3@9882,4303 10057,4303 10250,4496 v3@10250,4926 ; v3@9887.07,4293.93 cw(c9908.97,4272.03) 9908.97,4303 ; v3@10242.93,4917.93 cw(c10225.86,4900.86) 10250,4900.86 cw(c10274.14,4900.86) v3@10257.07,4917.93
  other v1: 4945,6018
  other v3: 9880,4301 10250,4925
ADCA5: CN1.47 D11.1 D12.2 P5.1 | length 12556.5
  Top Layer w20: v2@3012,4881 4767,4881 5102,5216 5610,5216 5611,5215 v1(5628,5215) ; v2@3015.54,4875.46 cw(c3028.9,4862.1) 3028.9,4881 ; 5236,5216 5288,5164 ; 5237.04,5214.96 cw(c5149.07,5127) CN1.47@5273.47,5127 ; 5271.18,5180.82 cw(c5217.36,5127) CN1.47@5293.47,5127 ; 5272,5180 cw(c5247.94,5155.94) CN1.47@5276.57,5137.55 ; CN1.47@5279.19,5140.81 ccw(c5257.93,5162.07) 5288,5162.07 ; CN1.47@5288,5129 5288,5164 ; 5289.55,5162.45 cw(c5269.32,5142.21) CN1.47@5293.4,5126.74 ; CN1.47@5300.6,5144.99 cw(c5308.64,5164) 5288,5164 ; 5589.37,5216 cw(c5589.37,5176.37) v1@5617.39,5204.39 ; 5594.2,5216 ccw(c5594.2,5248.8) v1@5617.39,5225.61 ; v1(6560,5995) 6634,6069 9881,6069 10336,5614 v3@10336,4900 ; v1@6560,6010 ccw(c6560,6046.21) 6585.61,6020.61 ccw(c6611.21,5995) v1@6575,5995 ; D11.1@10040.58,4210.42 ccw(c10010.61,4240.39) 10053,4240.39 ccw(c10095.39,4240.39) D11.1@10065.42,4210.42 ; D12.2@10040.58,4386.58 cw(c10010.61,4356.61) 10053,4356.61 cw(c10095.39,4356.61) D12.2@10065.42,4386.58 ; 10053,4244.21 ccw(c10114.21,4244.21) D11.1@10070.93,4200.93 ; 10053,4292.5 ccw(c10162.5,4292.5) D11.1@10085.07,4215.07 ; D12.2@10053,4403 D11.1@10053,4198 ; D11.1@10068.16,4209.8 cw(c10054,4212.4) 10054,4198 D11.1@10053,4198 ; D11.1@10068.24,4210.19 cw(c10053,4213.62) D11.1@10053,4198 ; v3@10329.93,4904.07 ccw(c10315.27,4918.73) 10336,4918.73 ; 10336,4923.56 ccw(c10363.56,4923.56) v3@10344.07,4904.07
  Bottom Layer w20: P5.1@2271.19,5281.19 cw(c2237.86,5247.86) 2285,5247.86 cw(c2332.14,5247.86) P5.1@2298.81,5281.19 ; P5.1@2285,5295 2285,5010 2418,4877 v2@3012,4877 ; 2995.1,4877 ccw(c2995.1,4895.9) v2@3008.46,4882.54 ; v1@5617.39,5225.61 ccw(c5591.79,5251.21) 5628,5251.21 ccw(c5664.21,5251.21) v1@5638.61,5225.61 ; v1(5628,5215) 5628,5694 5502,5820 5502,5942 5556,5996 6560,5996 v1(6560,5995) ; 6521.37,5996 cw(c6521.37,5956.37) v1@6549.39,5984.39 ; 6526.2,5996 ccw(c6526.2,6028.8) v1@6549.39,6005.61 ; v3@10078,4218 ccw(c10078,4237.31) 10091.66,4223.66 ; v3@10085,4208 10085,4217 10337,4469 ; v3@10088,4208 cw(c10116.97,4208) 10096.49,4228.49 ; v3@10329.93,4889.93 cw(c10312.86,4872.86) 10337,4872.86 cw(c10361.14,4872.86) v3@10344.07,4889.93 ; 10337,4467 v3@10337,4908
  other v2: 3012,4879
  other v3: 10078,4208 10337,4897
ADCA6: CN3.7 D5.1 D6.2 P6.2 | length 4095.1
  Top Layer w20: v2(8120,4174) v2@8935,4174 ; D5.1@9547.58,4206.42 ccw(c9512.78,4241.22) 9562,4241.22 ; D6.2@9547.58,4382.58 cw(c9512.78,4347.78) 9562,4347.78 ; D5.1@9562,4194 D6.2@9562,4391 ; 9562,4231.56 ccw(c9597.56,4231.56) D5.1@9572.42,4206.42 ; 9562,4357.44 cw(c9597.56,4357.44) D6.2@9572.42,4382.58
  Bottom Layer w20: 7924,3558 ccw(c7966.23,3600.23) CN3.7@7987.16,3544.29 ; 7945.99,3536.01 ccw(c7978.2,3568.23) CN3.7@7994.17,3525.56 ; CN3.7@7978.12,3514.63 ccw(c7956,3498.79) 7956,3526 ; CN3.7@7978.12,3537.37 cw(c7956,3553.21) 7956,3526 ; CN3.7@7994,3526 7956,3526 ; 8106.34,4163.34 cw(c8120,4149.69) v2@8120,4169 ; v2@8121.5,4178.5 7905,3962 7905,3577 7956,3526 ; v2@8935,4174 8935,4799 9021,4885 9021,5284 9050,5313 P6.2@9104,5313 ; v2@8935,4176.07 8937.01,4176.06 v3(9529,4173) ; 8935,4191.9 ccw(c8953.9,4191.9) v2@8940.54,4178.54 ; P6.2@9089.19,5299.19 ccw(c9055.86,5265.86) 9055.86,5313 ccw(c9055.86,5360.14) P6.2@9089.19,5326.81 ; v3@9521.89,4165.97 ccw(c9504.73,4148.98) 9504.86,4173.12 ccw(c9504.98,4197.27) v3@9521.97,4180.11
  other v2: 8937,4175
ADCA7: CN3.9 D7.1 D8.2 P6.4 | length 5145.4
  Top Layer w20: v2@8034,4248 v2@8981,4248 ; v2@8037.54,4254.54 ccw(c8053.31,4270.31) 8053.31,4248 ; v2@8420,5384 9172,5384 9200,5356 ; 8966.1,4248 cw(c8966.1,4229.1) v2@8979.46,4242.46 ; P6.4@9189.19,5326.81 ccw(c9163.1,5352.9) 9200,5352.9 ; P6.4@9200,5314 9200,5356 ; P6.4@9214.12,5329.05 cw(c9232.77,5356) 9200,5356 ; D7.1@9384.58,4206.42 ccw(c9354.61,4236.39) 9397,4236.39 ccw(c9439.39,4236.39) D7.1@9409.42,4206.42 ; D8.2@9384.58,4382.58 cw(c9354.61,4352.61) 9397,4352.61 cw(c9439.39,4352.61) D8.2@9409.42,4382.58 ; D7.1@9397,4194 D8.2@9397,4399 ; D7.1@9397,4214.03 cw(c9427.97,4214.03) v3@9406.07,4235.93 ; 9397,4271.97 ccw(c9427.97,4271.97) v3@9406.07,4250.07
  Bottom Layer w20: 7944.44,3425 ccw(c7944.44,3475.56) CN3.9@7980.19,3439.81 ; 7949.27,3425 cw(c7949.27,3381.27) CN3.9@7980.19,3412.19 ; CN3.9@7994,3426 7993,3425 7894,3425 7839,3480 7839,4054 8036,4251 8036,4997 v2@8426,5387 ; 8024.05,4239.05 ccw(c8012.1,4251) v2@8029,4251 ; v2@8030.46,4254.54 ccw(c8017.1,4267.9) 8036,4267.9 ; 8412.34,5373.34 cw(c8426,5359.69) v2@8426,5379 ; v2@8983,4245 v3@9398,4245 ; 9370.03,4245 cw(c9370.03,4214.03) v3@9391.93,4235.93
  other v2: 8983,4246 8034,4251 8426,5384
  other v3: 9399,4243
ADCB0: CN1.38
ADCB1: C15.2 CN1.40 P4.2 | length 5750.9
  Top Layer w20: P4.2@1561,4448 1750,4448 1775,4473 1854,4473 ccw(c1854,4487.93) C15.2@1868.22,4483.37 ; P4.2@1574.81,4437.19 cw(c1600.9,4411.1) 1600.9,4448 ; P4.2@1574.81,4464.81 ccw(c1615.39,4505.39) 1615.39,4448 ; 1831.91,4473 ccw(c1831.91,4529.75) C15.2@1872.04,4489.62
  Bottom Layer w20: P4.2@1561,4448 1721,4448 2121,4048 2487,4048 ; P4.2@1574.81,4437.19 cw(c1600.9,4411.1) 1600.9,4448 ; P4.2@1574.81,4464.81 ccw(c1615.39,4505.39) 1615.39,4448 ; 2488,4048 5499,4048 5693,4242 CN1.40@5693,5027 ; CN1.40@5679.19,5013.19 cw(c5645.86,4979.86) 5693,4979.86 cw(c5740.14,4979.86) CN1.40@5706.81,5013.19
ADCB2: C13.2 CN1.42 R21.2 | length 4548.4
  Top Layer w20: C13.2@2230,4479 2266,4478.6 ; C13.2@2242.96,4467.57 cw(c2269.58,4440.96) 2269.58,4478.6 cw(c2269.58,4516.24) C13.2@2242.96,4489.62 ; C13.2@2243.66,4488.87 ccw(c2266.34,4508.75) 2266,4478.6 ; C13.2@2243.74,4468.41 cw(c2266,4449.19) 2266,4478.6 ; C13.2@2243.74,4488.79 ccw(c2266,4508.01) 2266,4478.6 ; C13.2@2243.81,4468.49 cw(c2265.68,4449.88) 2266,4478.6 ; 2483,4451 R21.2@2670,4451 ; 2485,4451 2457.4,4478.6 2266,4478.6 ; 2617.03,4451 ccw(c2617.03,4504.97) R21.2@2655.19,4466.81 ; 2626.68,4451 cw(c2626.68,4410.68) R21.2@2655.19,4439.19
  Bottom Layer w20: R21.2@2669,4453 2738,4453 3013,4178 5299,4178 5593,4472 CN1.42@5593,5025 ; R21.2@2682.81,4439.19 cw(c2716.14,4405.86) 2716.14,4453 cw(c2716.14,4500.14) R21.2@2682.81,4466.81 ; CN1.42@5579.19,5013.19 cw(c5545.86,4979.86) 5593,4979.86 cw(c5640.14,4979.86) CN1.42@5606.81,5013.19
ADCB3: C14.2 CN1.44 R23.2 | length 3323.7
  Top Layer w20: C14.2@3068,4472 3252,4472 3270,4454 3467.85,4454.1 3640.31,4281.81 5126.67,4282.54 v2@5168.58,4324.49 ; C14.2@3093.96,4488.62 ccw(c3134.09,4528.75) 3134.09,4472 ; 5161.2,4317.1 cw(c5173.01,4305.3) v2@5173,4322 ; R23.2@3419.81,4439.2 cw(c3455.74,4403.31) 3455.72,4454.09 ccw(c3455.74,4403.31) R23.2@3419.81,4439.2 ; R23.2@3419.8,4466.81 ccw(c3450.55,4497.59) 3450.57,4454.09 cw(c3450.55,4497.59) R23.2@3419.8,4466.81
  Bottom Layer w20: v2@5173,4332 ccw(c5173,4348.9) 5184.95,4336.95 ; v2@5174.5,4326.5 5494,4646 CN1.44@5494,5028 ; CN1.44@5479.19,5013.19 cw(c5443.44,4977.44) 5494,4977.44 ; 5494,4982.27 cw(c5537.73,4982.27) CN1.44@5506.81,5013.19
  other v2: 5173,4327
ADCB4: CN1.46
ADCB5: CN1.48
ADCB6: CN3.11 D9.1 D10.2 P6.6 | length 5596.5
  Top Layer w20: v2(7927,4333) v2@8980,4333 ; v2@8290,5453 9233,5453 9303,5383 P6.6@9303,5314 ; D9.1@9224.58,4206.42 ccw(c9192.19,4238.81) 9238,4238.81 ; D10.2@9224.58,4382.58 cw(c9192.19,4350.19) v3@9238,4350.19 ; v3@9230.93,4324.93 cw(c9213.86,4307.86) 9238,4307.86 cw(c9262.14,4307.86) v3@9245.07,4324.93 ; v3@9230.93,4339.07 ccw(c9213.86,4356.14) 9238,4356.14 ccw(c9262.14,4356.14) v3@9245.07,4339.07 ; D9.1@9238,4193 D10.2@9238,4399 ; 9238,4233.98 ccw(c9276.98,4233.98) D9.1@9249.42,4206.42 ; 9238,4355.02 cw(c9276.98,4355.02) D10.2@9249.42,4382.58 ; P6.6@9289.19,5326.81 ccw(c9255.86,5360.14) 9303,5360.14 ccw(c9350.14,5360.14) P6.6@9316.81,5326.81
  Bottom Layer w20: 7915.64,4317.64 ccw(c7900.27,4333) v2@7922,4333 ; v2@7923.46,4336.54 ccw(c7907.69,4352.31) 7930,4352.31 ; CN3.11@7980.19,3312.19 ccw(c7946.86,3278.86) 7946.86,3326 ccw(c7946.86,3373.14) CN3.11@7980.19,3339.81 ; CN3.11@7994,3326 7844,3326 7770,3400 7770,4172 7930,4332 7930,5093 v2@8290,5453 ; 8276.22,5439.22 cw(c8295,5420.44) v2@8295,5447 ; v2(8984,4333) v3@9237,4333 ; 9211.44,4333 cw(c9211.44,4305.44) v3@9230.93,4324.93 ; 9216.27,4333 ccw(c9216.27,4353.73) v3@9230.93,4339.07
  other v2: 8295,5452
  other v3: 9238,4332
ADCREFM: CN3.5
ADCREFP: CN3.3
AGND: C13.1 C14.1 C15.1 C28.1 C29.2 D6.1 D8.1 D10.1 D12.1 D14.1 D16.1 D18.1 L4.1 P4.3 P5.5 P5.6 P6.5 R21.1 R23.1 T7.1 | length 14337.8
  Top Layer w20: P4.3@1561,4551 1561,4550 P4.3@1571,4560 ; D18.1@9044,4529 9045,4529 D18.1@9050,4534 ; D12.1@10080.5,4532.5 D12.1@10080.5,4538.5 ; C29.2@10118.61,2233.79 ccw(c10098,2225.95) 10098,2248 ; C29.2@10118.61,2262.21 cw(c10098,2270.05) 10098,2248 ; C29.2@10145,2248 10098,2248 ; C29.2@10166,2248 10164.4,2246.4 C29.2@10166.04,2246.44
  Top Layer w40: P4.3@1567.74,4544.26 cw(c1605.73,4506.27) 1605.73,4560 ; P4.3@1571,4560 R23.1@3406,4560 ; 1853.64,4560 cw(c1853.64,4523.98) C15.1@1879.11,4549.45 ; C15.1@1894.89,4549.45 cw(c1920.36,4523.98) 1920.36,4560 ; 2194.64,4560 cw(c2194.64,4523.98) C13.1@2220.11,4549.45 ; C13.1@2235.89,4549.45 cw(c2261.36,4523.98) 2261.36,4560 ; P5.6@2485,5396 2485,4737 R21.1@2661.5,4560.5 ; 2629.1,4560 cw(c2629.1,4513.1) R21.1@2662.26,4546.26 ; R21.1@2675.74,4546.26 cw(c2708.9,4513.1) 2708.9,4560 ; 3043.22,4560 cw(c3043.22,4520.56) C14.1@3071.11,4548.45 ; C14.1@3086.89,4548.45 cw(c3114.78,4520.56) 3114.78,4560 ; 3366.1,4560 cw(c3366.1,4513.1) R23.1@3399.26,4546.26 ; R23.1@3406,4553 3410,4557 3491,4557 3608,4440 7532,4440 7624,4532 D18.1@9058,4532 ; R23.1@3412.74,4546.26 cw(c3438.66,4520.34) 3438.66,4557 ; L4.1@7646.89,4551.55 ccw(c7694.09,4598.75) 7694.09,4532 ; 9012.98,4532 cw(c9012.98,4489.85) D18.1@9042.78,4519.65 ; D18.1@9050,4534 D12.1@10055,4534 ; D18.1@9069.22,4519.65 cw(c9103.85,4485.02) 9103.85,4534 ; 9189.15,4534 cw(c9189.15,4485.02) D10.1@9223.78,4519.65 ; D10.1@9202.44,4534 cw(c9202.44,4501.44) D10.1@9225.46,4524.46 ; D10.1@9232.54,4524.46 cw(c9255.56,4501.44) D10.1@9255.56,4534 ; D10.1@9250.22,4519.65 cw(c9284.85,4485.02) 9284.85,4534 ; 9349.15,4534 cw(c9349.15,4485.02) D8.1@9383.78,4519.65 ; D8.1@9410.22,4519.65 cw(c9444.85,4485.02) 9444.85,4534 ; 9512.15,4534 cw(c9512.15,4485.02) D6.1@9546.78,4519.65 ; D6.1@9573.22,4519.65 cw(c9607.85,4485.02) 9607.85,4534 ; 9673.81,4534 cw(c9673.81,4498.68) D16.1@9698.78,4523.65 ; D16.1@9725.22,4523.65 cw(c9750.19,4498.68) 9750.19,4534 ; 9840.81,4534 cw(c9840.81,4498.68) D14.1@9865.78,4523.65 ; D14.1@9892.22,4523.65 cw(c9917.19,4498.68) 9917.19,4534 ; C28.1@9896,2246.4 C29.2@10164.4,2246.4 ; 10014.81,4534 cw(c10014.81,4498.68) D12.1@10039.78,4523.65 ; D12.1@10060.87,4521.44 cw(c10060.87,4447.36) 10113.26,4499.74 ; 10079.72,2246.4 ccw(c10079.72,2324.28) C29.2@10134.79,2269.21 ; D12.1@10080.5,4532.5 10319,4294 10319,2422 C29.2@10145,2248 ; 10087.43,2246.4 cw(c10087.43,2179.43) C29.2@10134.79,2226.79 ; C29.2@10206,2248 cw(c10353.27,2248) 10249.13,2352.13 ; 10282.06,4330.94 cw(c10223.12,4272) T7.1@10306.47,4272 ; T7.1@10309.26,4265.26 cw(c10285.76,4241.76) 10319,4241.76
  Bottom Layer w40: v1@9228.5,4531.5 9303,4606 P6.5@9303,5212
  other v1: 9229,4528
BLK: C5.2 CN3.26 key3.3 R13.1 | length 2528.3
  Top Layer w20: CN3.26@8094,2626 8746,2626 9002,2370 9403,2370 key3.3@9568,2535 ; CN3.26@8107.81,2612.19 cw(c8141.14,2578.86) 8141.14,2626 cw(c8141.14,2673.14) CN3.26@8107.81,2639.81 ; 9504.02,2471.02 ccw(c9442.04,2533) key3.3@9529.69,2533 ; 9511.26,2478.26 cw(c9563,2426.53) key3.3@9563,2499.69
  Bottom Layer w20: key3.3@9563,2533 R13.1@9755.4,2533 ; key3.3@9586.55,2509.45 cw(c9643.41,2452.59) 9643.41,2533 cw(c9643.41,2613.41) key3.3@9586.55,2556.55 ; 9697.57,2533 cw(c9697.57,2489.9) R13.1@9728.04,2520.38 ; 9705.28,2533 ccw(c9705.28,2565.18) R13.1@9728.04,2542.43 ; R13.1@9731.98,2542.43 ccw(c9705.36,2569.04) 9743,2569.04 ccw(c9780.64,2569.04) R13.1@9754.02,2542.43 ; C5.2@9731.98,2701.57 cw(c9705.36,2674.96) 9743,2674.96 cw(c9780.64,2674.96) C5.2@9754.02,2701.57 ; R13.1@9741.4,2533 9741.7,2532.7 R13.1@9743,2531.4 ; R13.1@9743,2530.8 C5.2@9743,2712
BLU: CN3.16 D1.2 | length 1246.3
  Top Layer w20: CN3.16@8094,3126 8715,3126 9003,3414 9086.86,3414 D1.2@9086.86,3415 ; CN3.16@8107.81,3112.19 cw(c8141.14,3078.86) 8141.14,3126 cw(c8141.14,3173.14) CN3.16@8107.81,3139.81 ; 9046.8,3414 ccw(c9046.8,3455.05) D1.2@9075.83,3426.02 ; 9051.63,3414 cw(c9051.63,3379.78) D1.2@9075.83,3403.98
BUZZER: CN3.8 R37.1 R38.2 | length 1495.2
  Top Layer w20: CN3.8@8095,3528 8970,3528 9075.6,3633.6 R38.2@9075.6,3853 ; CN3.8@8107.81,3512.19 cw(c8145.97,3474.03) 8145.97,3528 ; CN3.8@8107.81,3539.81 ccw(c8136.32,3568.32) 8136.32,3528 ; 9039.53,3597.53 cw(c9075.6,3561.47) R37.1@9075.6,3612.47 ; R37.1@9052.9,3610.9 ccw(c9035.73,3628.06) R37.1@9060.01,3628.06 ; R37.1@9064.57,3646.96 ccw(c9037.96,3673.58) 9075.6,3673.58 ccw(c9113.24,3673.58) R37.1@9086.62,3646.96 ; R38.2@9064.57,3838.04 cw(c9037.96,3811.42) 9075.6,3811.42 cw(c9113.24,3811.42) R38.2@9086.62,3838.04
CAP2: CN1.6 CN1.12 T2.1 UR1.4 | length 7915.8
  Top Layer w20: CN1.12@7079.44,5012.95 cw(c7048.59,4981) 7093,4981 ; CN1.12@7093,5027 7093,4981 ; CN1.12@7106.56,5012.95 ccw(c7137.41,4981) 7093,4981 ; CN1.6@7379.19,5013.19 cw(c7345.86,4979.86) 7393,4979.86 cw(c7440.14,4979.86) CN1.6@7406.81,5013.19 ; CN1.6@7393,5027 7393,4970 7367,4944 7130,4944 7093,4981
  Bottom Layer w20: v4@3227,2078 3395,2078 3449,2024 3695,2024 3753,1966 ; T2.1@3744.19,1724.81 ccw(c3720.51,1748.49) 3754,1748.49 ; T2.1@3753,1711 6473,1711 7093,2331 CN1.12@7093,5026 ; T2.1@3754,1707 3754,1962 ; 3754,1767.8 ccw(c3814.8,1767.8) 3771.81,1724.81 ccw(c3805.14,1758.14) 3805.14,1711 ccw(c3805.14,1663.86) T2.1@3771.81,1697.19 ; CN1.12@7079.19,5013.19 cw(c7045.86,4979.86) 7093,4979.86 cw(c7140.14,4979.86) CN1.12@7106.81,5013.19
  other v4: 3228,2079
CAP3: CN1.8 CN1.10 T4.1 UR1.6 | length 7665.4
  Top Layer w20: CN1.10@7193,5027 7292,5027 CN1.8@7292,5028 ; CN1.10@7206.81,5013.19 cw(c7240.14,4979.86) 7240.14,5027 cw(c7240.14,5074.14) CN1.10@7206.81,5040.81 ; CN1.8@7279.19,5013.19 ccw(c7245.86,4979.86) 7245.86,5027 ccw(c7245.86,5074.14) CN1.8@7279.19,5040.81
  Bottom Layer w20: v4(3231,1978) 3233,1978 3637,1574 6532,1574 7193,2235 CN1.10@7193,5027 ; T4.1@4038.19,1560.19 ccw(c4004.86,1526.86) 4004.86,1574 ccw(c4004.86,1621.14) T4.1@4038.19,1587.81 ; T4.1@4065.81,1560.19 cw(c4099.14,1526.86) 4099.14,1574 cw(c4099.14,1621.14) T4.1@4065.81,1587.81 ; CN1.10@7179.19,5013.19 cw(c7145.86,4979.86) 7193,4979.86 cw(c7240.14,4979.86) CN1.10@7206.81,5013.19
CAP5: CN1.22 CN1.28 T10.1 UP1.4 | length 5295.7
  Top Layer w20: CN1.28@6279.19,5013.19 cw(c6245.86,4979.86) 6293,4979.86 cw(c6340.14,4979.86) CN1.28@6306.81,5013.19 ; CN1.28@6293,5027 6293,4968 6315,4946 6558,4946 6593,4981 ; CN1.22@6579.44,5012.95 cw(c6548.59,4981) 6593,4981 ; CN1.22@6593,5027 6593,4981 ; CN1.22@6606.56,5012.95 ccw(c6637.41,4981) 6593,4981
  Bottom Layer w20: v4(3194,3333) 3276,3333 3312,3369 5828,3369 6293,3834 CN1.28@6293,5027 ; T10.1@3899.19,3355.19 ccw(c3865.86,3321.86) 3865.86,3369 ccw(c3865.86,3416.14) T10.1@3899.19,3382.81 ; T10.1@3926.81,3355.19 cw(c3960.14,3321.86) 3960.14,3369 cw(c3960.14,3416.14) T10.1@3926.81,3382.81 ; CN1.28@6279.19,5013.19 cw(c6245.86,4979.86) 6293,4979.86 cw(c6340.14,4979.86) CN1.28@6306.81,5013.19
CAP6: CN1.24 CN1.26 T11.1 UP1.6 | length 5210
  Top Layer w20: CN1.26@6393,5027 CN1.24@6493,5027 ; CN1.26@6406.81,5013.19 cw(c6440.14,4979.86) 6440.14,5027 cw(c6440.14,5074.14) CN1.26@6406.81,5040.81 ; CN1.24@6479.19,5013.19 ccw(c6445.86,4979.86) 6445.86,5027 ccw(c6445.86,5074.14) CN1.24@6479.19,5040.81
  Bottom Layer w20: v4(3194,3232) 3282,3232 3325,3275 6002,3275 6393,3666 CN1.26@6393,5027 ; T11.1@4089.19,3261.19 ccw(c4055.86,3227.86) 4055.86,3275 ccw(c4055.86,3322.14) T11.1@4089.19,3288.81 ; T11.1@4116.81,3261.19 cw(c4150.14,3227.86) 4150.14,3275 cw(c4150.14,3322.14) T11.1@4116.81,3288.81 ; CN1.26@6379.19,5013.19 cw(c6345.86,4979.86) 6393,4979.86 cw(c6440.14,4979.86) CN1.26@6406.81,5013.19
CAP_L2: CN3.21 T12.1 UP1.8 | length 5082
  Top Layer w20: UP1.8@3446,3182 3447.39,3182 3496,3181.83 3572.17,3181.83 3633,3121 T12.1@3633,2837 ; T12.1@3618.19,2847.81 ccw(c3582.44,2883.56) 3633,2883.56 ; 3633,2878.73 ccw(c3676.73,2878.73) T12.1@3645.81,2847.81 ; v5(4118,2830) 7990,2830 CN3.21@7994,2826 ; 7937.2,2830 cw(c7937.2,2769.2) CN3.21@7980.19,2812.19 ; 7956.51,2830 ccw(c7956.51,2863.49) CN3.21@7980.19,2839.81
  Bottom Layer w20: T12.1@3632,2830 v5(4118,2830) ; T12.1@3645.81,2820.19 cw(c3669.49,2796.51) 3669.49,2830 ; T12.1@3645.81,2847.81 ccw(c3688.8,2890.8) 3688.8,2830
CAP_M2: CN3.23 T14.1 UP1.12 | length 5224.7
  Top Layer w20: UP1.12@3447.39,3381.83 3713.17,3381.83 4023,3072 T14.1@4023,2740 ; T14.1@4009.19,2756.81 ccw(c3975.86,2790.14) 4023,2790.14 ccw(c4070.14,2790.14) 4036.81,2756.81 ccw(c4087.04,2807.04) 4087.04,2736 ; T14.1@4022,2736 CN3.23@7979,2736 ; T14.1@4036.81,2729.19 cw(c4053.24,2712.76) 4053.24,2736 ; 7922.71,2736 cw(c7922.71,2654.71) CN3.23@7980.19,2712.19 ; CN3.23@7980,2740 CN3.23@7994,2726
CAP_N2: CN3.25 T13.1 UP1.10 | length 5353.1
  Top Layer w20: UP1.10@3447.39,3281.83 3689.17,3281.83 3814,3157 T13.1@3814,2626 ; T13.1@3799.19,2642.81 ccw(c3763.44,2678.56) 3814,2678.56 ; T13.1@3814,2630 7990,2630 CN3.25@7994,2626 ; 3814,2673.73 ccw(c3857.73,2673.73) 3826.81,2642.81 ccw(c3857.73,2673.73) 3857.73,2630 ; T13.1@3826.81,2615.19 cw(c3862.56,2579.44) 3862.56,2630 ; 7937.2,2630 cw(c7937.2,2569.2) CN3.25@7980.19,2612.19 ; 7956.51,2630 ccw(c7956.51,2663.49) CN3.25@7980.19,2639.81
CP1: CN1.17 P6.12 | length 3518.4
  Top Layer w20: CN1.17@6779.19,5140.81 ccw(c6745.86,5174.14) 6793,5174.14 ccw(c6840.14,5174.14) CN1.17@6806.81,5140.81 ; CN1.17@6793,5127 6793,5449 6931,5587 9450,5587 9600,5437 P6.12@9600,5315 ; P6.12@9589.19,5326.81 ccw(c9563.1,5352.9) 9600,5352.9 ; 9600,5367.39 ccw(c9657.39,5367.39) P6.12@9616.81,5326.81
CP2: CN1.31 P5.11 | length 4050.3
  Top Layer w20: P5.11@2771.19,5281.19 cw(c2742.68,5252.68) 2783,5252.68 ; 2783,5243.03 cw(c2836.97,5243.03) P5.11@2798.81,5281.19 ; P5.11@2783,5295 2783,5170 2995,4958 4631,4958 4956,5283 5975,5283 6093,5165 ; 6032.79,5225.21 cw(c5934.59,5127) CN1.31@6073.47,5127 ; 6066.94,5191.06 cw(c6002.87,5127) CN1.31@6093.47,5127 ; CN1.31@6081.63,5142.88 ccw(c6065.79,5165) 6093,5165 ; CN1.31@6093,5127 6093,5165 ; CN1.31@6104.37,5142.88 cw(c6120.21,5165) 6093,5165
D0: CN2.3
D1: CN2.4
D2: CN2.5
D3: CN2.6
D4: CN2.7
D5: CN2.8
D6: CN2.9
D7: CN2.10
D8: CN2.11
D9: CN2.12
D10: CN2.13
D11: CN2.14
D12: CN2.15
D13: CN2.16
D14: CN2.17
D15: CN2.18
DA0: CN3.27
DA1: CN3.28